# EAGLE board LEDTest (EAGLE 9.6.2)
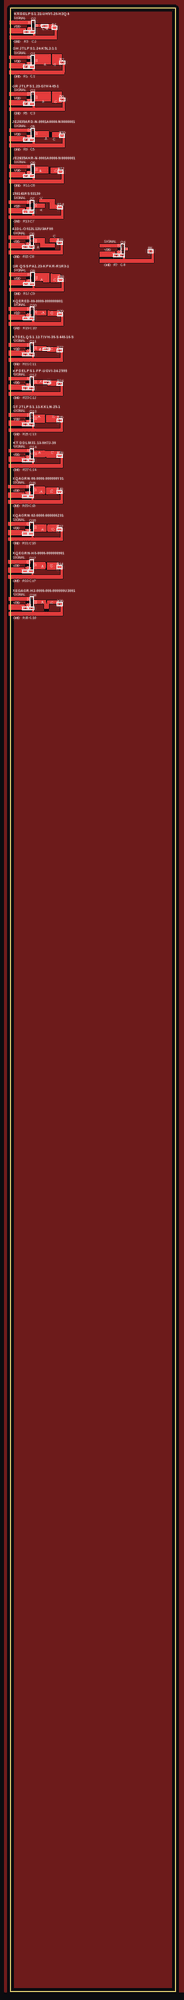
[diagram p0: board, top side]

Size 50 x 600 mm. Coordinates in mm from the lower left corner, seen from the top.
Outline: 0,600 0,0 50,0 50,600 0,600
Copper layers (1*16): Top 0.035mm / dielectric 1.5mm / Bottom 0.035mm
Design rules "default": minimum track width 6mil, minimum drill 0.35mm, track to track 6mil, track to pad 6mil, pad to pad 6mil, via to via 6mil, smd to smd 6mil, copper to edge 40mil, drill to drill 6mil, minimum pad ring 10mil, minimum via ring 8mil, stop-mask expansion 4mil, vias tented up to drill 0mil, thermal gap 10mil

## Footprints (pad centres in the part's own frame; a part is rotated, then mirrored left to right if it is on the bottom)
0402 = smd 0.635 x 0.6: 1 -0.432,0; 2 0.432,0
LED-0603 = smd 0.7 x 0.5: A -0.641,0 | smd 1.05 x 0.5: C 0.475,0
DIODESINC-DMG2305UX = smd 0.9 x 0.8: D 1,0; G -1,0.95; S -1,-0.95

## Placement (x,y rotation side)
C1  [0402]  6.61,582.3 0 top
C2  [0402]  6.76,592.83 0 top
C3  [0402]  6.61,571.13 0 top
C4  [0402]  33.85,525.25 0 top
C5  [0402]  6.61,560.2 0 top
C6  [0402]  6.61,549.28 0 top
C7  [0402]  6.45,538.45 0 top
C8  [0402]  6.35,527.75 0 top
C9  [0402]  6.55,516.55 0 top
C10  [0402]  6.43,506.14 0 top
C11  [0402]  6.35,495.25 0 top
C12  [0402]  6.35,485.05 0 top
C13  [0402]  6.35,474.05 0 top
C14  [0402]  6.35,463.25 0 top
C15  [0402]  6.25,452.35 0 top
C16  [0402]  6.25,441.05 0 top
C17  [0402]  6.25,429.65 0 top
C18  [0402]  6.35,418.45 0 top
KPDELPS1.FP-UGVI-34-Z555  [LED-0603]  10.99,486.78 180 top
KRDELPS1.22-UHVI-26-H3Q4  [LED-0603]  10.46,594.65 0 top
KTDELQS1.12-TIVH-36-S446-10-S  [LED-0603]  10.89,496.88 180 top
Q1  [DIODESINC-DMG2305UX]  6.78,584.25 0 top
Q2  [DIODESINC-DMG2305UX]  6.93,594.78 0 top
Q3  [DIODESINC-DMG2305UX]  6.78,573.07 0 top
Q4  [DIODESINC-DMG2305UX]  34.02,527.19 0 top
Q5  [DIODESINC-DMG2305UX]  6.78,562.15 0 top
Q6  [DIODESINC-DMG2305UX]  6.78,551.23 0 top
Q7  [DIODESINC-DMG2305UX]  6.62,540.39 0 top
Q8  [DIODESINC-DMG2305UX]  6.52,529.69 0 top
Q9  [DIODESINC-DMG2305UX]  6.72,518.49 0 top
Q10  [DIODESINC-DMG2305UX]  6.6,508.08 0 top
Q11  [DIODESINC-DMG2305UX]  6.52,497.19 0 top
Q12  [DIODESINC-DMG2305UX]  6.52,486.99 0 top
Q13  [DIODESINC-DMG2305UX]  6.52,475.99 0 top
Q14  [DIODESINC-DMG2305UX]  6.52,465.19 0 top
Q15  [DIODESINC-DMG2305UX]  6.42,454.29 0 top
Q16  [DIODESINC-DMG2305UX]  6.42,442.99 0 top
Q17  [DIODESINC-DMG2305UX]  6.42,431.59 0 top
Q18  [DIODESINC-DMG2305UX]  6.52,420.39 0 top
R1  [0402]  4.8,582.3 0 top
R2  [0402]  15.73,583.57 0 top
R3  [0402]  4.95,592.83 0 top
R4  [0402]  13.33,594.1 0 top
R5  [0402]  4.8,571.13 0 top
R6  [0402]  15.73,572.4 0 top
R7  [0402]  32.05,525.25 0 top
R8  [0402]  42.46,526.52 0 top
R9  [0402]  4.8,560.2 0 top
R10  [0402]  15.62,561.43 0 top
R11  [0402]  4.8,549.28 0 top
R12  [0402]  15.22,550.55 0 top
R13  [0402]  4.65,538.45 0 top
R14  [0402]  15.06,539.72 0 top
R15  [0402]  4.55,527.75 0 top
R16  [0402]  14.96,529.02 0 top
R17  [0402]  4.75,516.55 0 top
R18  [0402]  15.16,517.82 0 top
R19  [0402]  4.62,506.14 0 top
R20  [0402]  15.04,507.41 0 top
R21  [0402]  4.55,495.25 0 top
R22  [0402]  14.96,496.52 0 top
R23  [0402]  4.55,485.05 0 top
R24  [0402]  14.96,486.32 0 top
R25  [0402]  4.55,474.05 0 top
R26  [0402]  14.96,475.32 0 top
R27  [0402]  4.55,463.25 0 top
R28  [0402]  14.96,464.52 0 top
R29  [0402]  4.45,452.35 0 top
R30  [0402]  14.86,453.62 0 top
R31  [0402]  4.45,441.05 0 top
R32  [0402]  14.86,442.32 0 top
R33  [0402]  4.45,429.65 0 top
R34  [0402]  14.86,430.92 0 top
R35  [0402]  4.55,418.45 0 top
R36  [0402]  14.96,419.72 0 top

## Library data of the parts
C1-C18 KPDELPS1.FP-UGVI-34-Z555 KRDELPS1.22-UHVI-26-H3Q4 KTDELQS1.12-TIVH-36-S446-10-S Q1-Q18 R1-R36 = EagleLibrary

## Tracks (layer width: path | path; a pad name or v marks a point on that pad's centre or on a via)
GND
  pour Top (isolate 0.254, no thermals): -1.52,610 -1.52,0 54.36,0 54.36,610
(copper drawn outside any net)
  shapes: Top area x175

## Text on the board
tNames: SIGNAL | VDD | C | A | GND | GH JTLPS1.24-K5L2-1-1 | SIGNAL | VDD | A | C | GND | GR JTLPS1.23-G7H4-45-1 | SIGNAL | VDD | A | C | GND | JE2835ARD-N-0001A0000-N0000001 | SIGNAL | VDD | A | C | GND | JE2835AHR-N-0001A0000-N0000001 | SIGNAL | VDD | A | C | GND | 150141RS63130 | C | SIGNAL | VDD | A | GND | A1DL-O612L12U3AF00 | SIGNAL | C | VDD | SIGNAL | A | VDD | GND | GR QSSPA1.23-KPKR-R1R3-1 | GND | SIGNAL | VDD | A | C | GND | XQERED-00-0000-000000801 | SIGNAL | VDD | A | C | GND | SIGNAL | VDD | A | C | GND | SIGNAL | A | C | VDD | GND | GT JTLPS1.13-KKLN-25-1 | SIGNAL | A | C | VDD | GND | KT DDLM31.13-6H7J-36 | SIGNAL | A | C | VDD | GND | XQAGRN-00-0000-000000Y01 | SIGNAL | VDD | A | C | GND | XQAGRN-02-0000-000000Z01 | SIGNAL | VDD | A | C | GND | XQEGRN-H0-0000-000000901 | SIGNAL | VDD | A | C | GND | XEGAGR-H2-0000-000-000000U3001 | SIGNAL | VDD | A | C | GND